# Altium PCB EC14_AdaptorBoard.PcbDoc
Units mm, origin at the board's own origin, x right, y up, seen from the top; angles counter-clockwise.
Board outline 91.4 x 34.2 mm, 2 copper layers (Top Layer, Bottom Layer); 40 components, 34 nets, 113 pads, 204 vias.
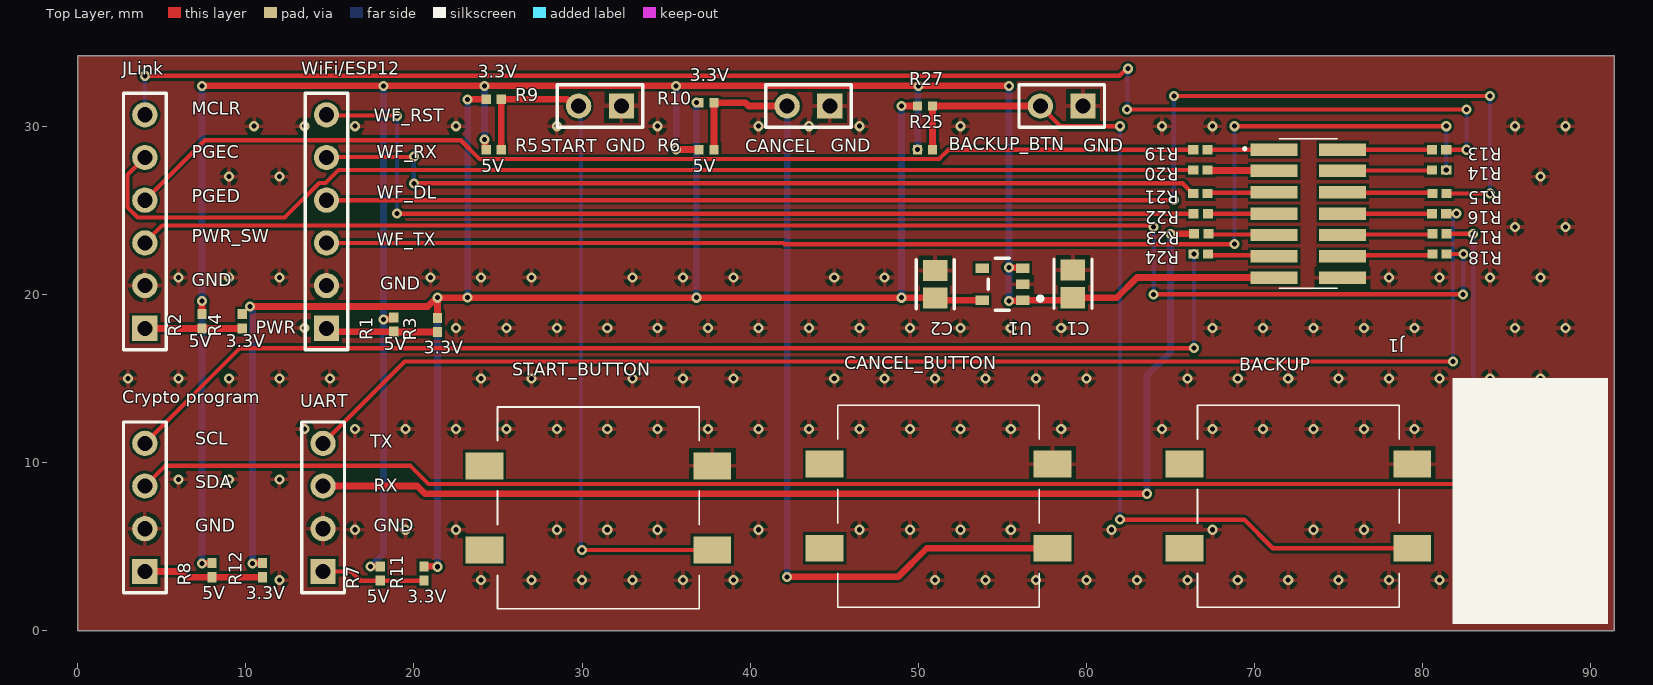
[diagram p0: Top Layer view]
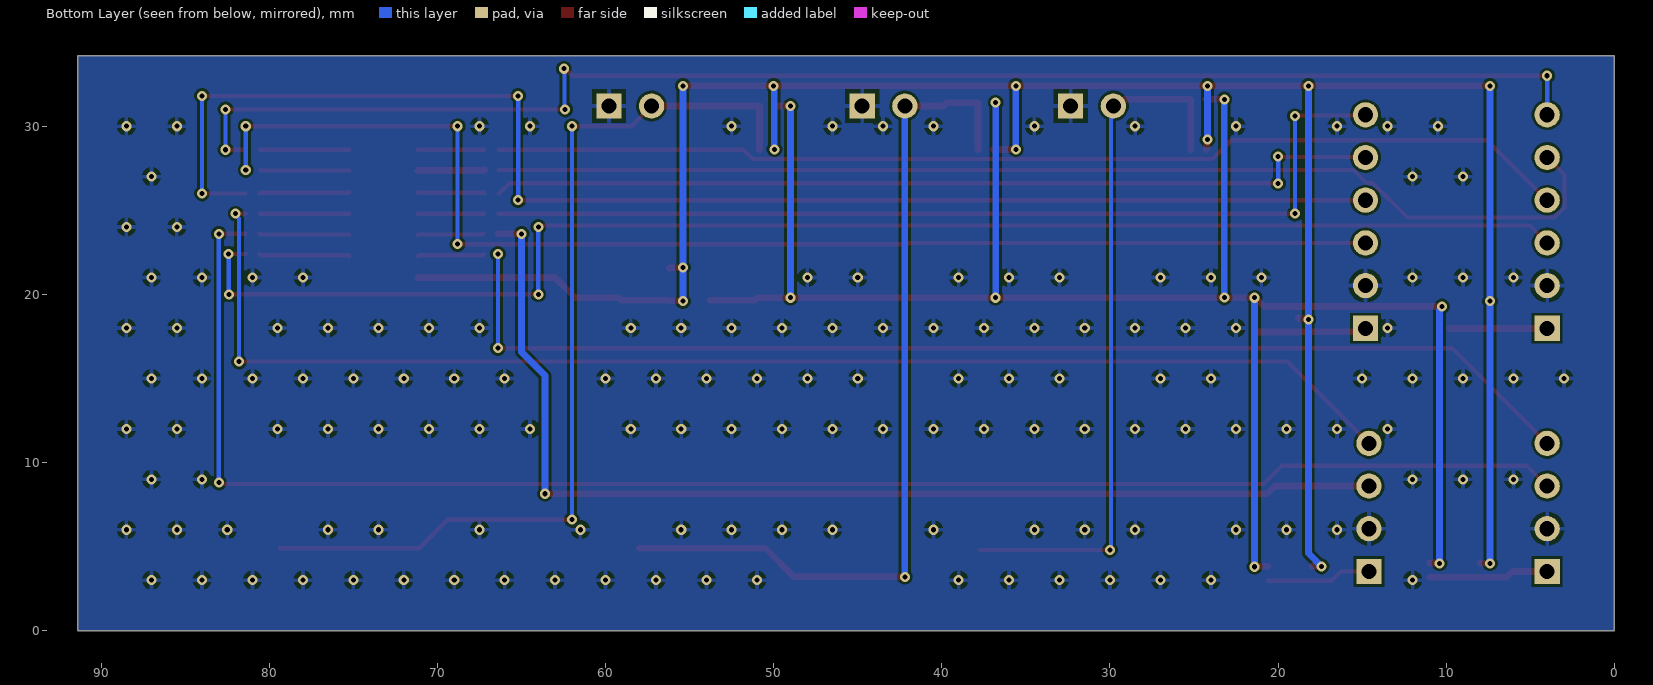
[diagram p1: Bottom Layer view, seen from below]

## Layer stack, top to bottom
Top Solder: solder mask 0.0102, Solder Resist, Dk 3.5
Top Layer: signal copper 0.0356
Dielectric 1: dielectric 0.32, FR-4, Dk 4.8
Bottom Layer: signal copper 0.0356
Bottom Solder: solder mask 0.0102, Solder Resist, Dk 3.5

## Board outline
0,0 91.4,0 91.4,34.2 0,34.2

## Design rules (kind name [scope] priority, off if disabled: settings)
Clearance [All] p1: gap=0.152 ignorepadtopadclearanceinfootprint=FALSE
PolygonConnect [All] p1: connectstyle=Relief reliefconductorwidth=0.254 reliefentries=4 polygonreliefangle="90 Angle" airgapwidth=0.254
RoomDefinition EC14_AdaptorBoard [InComponentClass('EC14_AdaptorBoard')] p1: confinementstyle=ConfineIn formatcopy=TRUE lockcomponents=FALSE outline 0,0 91.4,0 91.4,34.2 0,34.2
RoutingVias [All] p1: holewidth=0.3 width=0.6 viastyle="Through Hole" minholewidth=0.3 minwidth=0.6 maxholewidth=6 maxwidth=6.3
SolderMaskExpansion [All] p1: expansion=0.102 istentingtop=FALSE
Width [All] p1: maxlimit=1 minlimit=0.2 preferedwidth=0.4
30 further rules are at their usual default settings.

## Components (designator, comment, footprint, x,y, rotation, side; value= is the part's Value field where it differs from the comment)
BACKUP "1.14.001.503_0000" 1140015030000_BTN 72.6,7.4 r180 top
BACKUP_BTN "Header 2" HDR1X2 59.8,31.2 r180 top
C1 "10u 10V" FP-CL21-IPC_B 59.2,20.626 r90 top
C2 "10u 10V" FP-CL21-IPC_B 51,20.6 r90 top
CANCEL "Header 2" HDR1X2 44.74,31.2 r180 top
CANCEL_BUTTON "1.14.001.503_0000" 1140015030000_BTN 51.2,7.4 r180 top
"Crypto program" "Header 4" HDR1X4 4,3.52 r90 top
J1 "FTSH-107-01-F-DV" FTSH-107-XX-YYY-DV 73.2,24.8 r270 top
JLink "Header 6" HDR1X6 4,17.98 r90 top
R1 "0R 5% 0402 / DNI" RESC1005X40X25NL05T10 18.8,18.2 r90 top
R2 "0R 5% 0402 / DNI" RESC1005X40X25NL05T10 7.4,18.4 r90 top
R3 "0R 5% 0402" RESC1005X40X25NL05T10 21.4,18.175 r90 top
R4 "0R 5% 0402" RESC1005X40X25NL05T10 9.8,18.4 r90 top
R5 "10K 1% / DNI" RESC1005X40X25NL05T05 24.75,28.6 r0 top
R6 "10K 1% / DNI" RESC1005X40X25NL05T05 37.4,28.6 r0 top
R7 "0R 5% 0402 / DNI" RESC1005X40X25NL05T10 18,3.4 r90 top
R8 "0R 5% 0402 / DNI" RESC1005X40X25NL05T10 8,3.6 r90 top
R9 "10K 1%" RESC1005X40X25NL05T05 24.75,31.6 r0 top
R10 "10K 1%" RESC1005X40X25NL05T05 37.4,31.4 r0 top
R11 "0R 5% 0402" RESC1005X40X25NL05T10 20.6,3.4 r90 top
R12 "0R 5% 0402" RESC1005X40X25NL05T10 11,3.6 r90 top
R13 "0R 5% 0402" RESC1005X40X25NL05T10 80.975,28.6 r180 top
R14 "0R 5% 0402" RESC1005X40X25NL05T10 80.975,27.4 r180 top
R15 "0R 5% 0402" RESC1005X40X25NL05T10 81,26 r180 top
R16 "0R 5% 0402" RESC1005X40X25NL05T10 80.975,24.8 r180 top
R17 "0R 5% 0402" RESC1005X40X25NL05T10 81,23.6 r180 top
R18 "0R 5% 0402" RESC1005X40X25NL05T10 81,22.4 r180 top
R19 "0R 5% 0402" RESC1005X40X25NL05T10 66.775,28.6 r180 top
R20 "0R 5% 0402" RESC1005X40X25NL05T10 66.775,27.4 r180 top
R21 "0R 5% 0402" RESC1005X40X25NL05T10 66.775,26 r180 top
R22 "0R 5% 0402" RESC1005X40X25NL05T10 66.8,24.8 r180 top
R23 "0R 5% 0402" RESC1005X40X25NL05T10 66.825,23.6 r180 top
R24 "0R 5% 0402" RESC1005X40X25NL05T10 66.8,22.4 r180 top
R25 "10K 1% / DNI" RESC1005X40X25NL05T05 50.4,28.6 r0 top
R27 "10K 1%" RESC1005X40X25NL05T05 50.4,31.2 r0 top
START "Header 2" HDR1X2 32.34,31.2 r180 top
START_BUTTON "1.14.001.503_0000" 1140015030000_BTN 30.975,7.3 r180 top
U1 "AP2204K-3.3TRG1" FP-SOT25-MFG 55,20.6 r180 top
UART "Header 4" HDR1X4 14.6,3.52 r90 top
WiFi/ESP12 "Header 6" HDR1X6 14.8,17.98 r90 top

## Footprints (in the part's own frame and the unit in brackets; to place one, negate y for a bottom-side part, rotate by r counter-clockwise, add the part's x,y. Pads: shape width x height; smd on the part's side, far side on the other; paste and mask are expansions set on the pad)
1140015030000_BTN [mm]
  rect 2.25x1.6 smd: 1(-6.775,-2.5) 2(6.775,-2.5) 3(6.775,2.5) 4(-6.775,2.5)
  silkscreen extent -6,-6 6,6, body extent -7.74,-6 7.74,6, height 5.15
FP-CL21-IPC_B [mm]
  rect 1.255x1.456 smd paste+0 mask+0: 1(-0.826,0) 2(0.826,0)
  silkscreen extent -1.45,-1.13 1.45,1.13, body extent -1.7,-0.98 1.7,0.98, height 0.25
FP-SOT25-MFG [mm]
  rect 0.8x0.55 smd paste+0 mask+0: 1(-1.2,0.95) 2(-1.2,0) 3(-1.2,-0.95) 4(1.2,-0.95) 5(1.2,0.95)
  silkscreen extent -2.38,-1.55 0.85,1.55, body extent -1.7,-1.65 1.7,1.65, height 0.25
FTSH-107-XX-YYY-DV [mm]
  rect 0.74x2.79 smd: 1(-3.81,-2.035) 2(-3.81,2.035) 3(-2.54,-2.035) 4(-2.54,2.035) 5(-1.27,-2.035) 6(-1.27,2.035) 7(0,-2.035) 8(0,2.035) 9(1.27,-2.035) 10(1.27,2.035) 11(2.54,-2.035) 12(2.54,2.035) 13(3.81,-2.035) 14(3.81,2.035)
  silkscreen extent -4.44,-3.83 4.44,1.72
HDR1X2 [mm] "Connector; Header; 2 Position"
  rect 1.5x1.5 hole 0.9: 1(0,0)
  round 1.5 hole 0.9: 2(2.54,0)
  silkscreen extent -1.27,-1.27 3.81,1.27
HDR1X4 [mm] "Connector; Header; 4 Position"
  rect 1.5x1.5 hole 0.9: 1(0,0)
  round 1.5 hole 0.9: 2(2.54,0) 3(5.08,0) 4(7.62,0)
  silkscreen extent -1.27,-1.27 8.89,1.27
HDR1X6 [mm] "Connector; Header; 6 Position"
  rect 1.5x1.5 hole 0.9: 1(0,0)
  round 1.5 hole 0.9: 2(2.54,0) 3(5.08,0) 4(7.62,0) 5(10.16,0) 6(12.7,0)
  silkscreen extent -1.27,-1.27 13.97,1.27
RESC1005X40X25NL05T05 [mm] "Chip Resistor, 2-Leads, Body 1.00x0.50mm, IPC Medium Density"
  rect 0.55x0.55 smd: 1(-0.45,0) 2(0.45,0)
  body extent -0.53,-0.27 0.53,0.28, height 0.4
RESC1005X40X25NL05T10 [mm] "Chip Resistor, 2-Leads, Body 1.00x0.50mm, IPC Medium Density"
  rect 0.6x0.55 smd: 1(-0.425,0) 2(0.425,0)
  body extent -0.53,-0.27 0.53,0.28, height 0.4

## Part data
BACKUP CANCEL_BUTTON START_BUTTON: "Switch", Manufacturer_Name=RAFI, Manufacturer_Part_Number=1.14.001.503/0000, Mouser Part Number=611-1.14001.5030000, Datasheet Link=https://media.digikey.com/pdf/Data%20Sheets/RAFI%20PDF's/Racon_PCB_Tactile_Switches_Cat.pdf, Height=5.05mm, Mouser Price/Stock=https://www.mouser.co.uk/ProductDetail/RAFI/114001503-0000?qs=Mv7BduZupUj7blEiC6wMcw%3D%3D
BACKUP_BTN CANCEL START: "Header, 2-Pin", LatestRevisionDate=17-Jul-2002, LatestRevisionNote="Re-released for DXP Platform.", Publisher="Altium Limited"
C1 C2: library part CMP-2000-06103-2, "CL21A106KPFNNNE,    CL21 Series 0805 10uF 10V ±10% Tolerance X5R Multilayer Ceramic Chip Capacitor", Capacitance=10uF, Case Code (Imperial)=0805, Case Code (Metric)=2012, Dielectric=X5R, Max Operating Temperature=85°C, Min Operating Temperature=-55°C, Package Quantity=1, Tolerance=10%, Voltage Rating=10V, Case/Package=0805, Contact Plating=Tin, Depth=1.25mm, Height=1.25mm, Lead Free="Lead Free", Length=2mm, Mount="Surface Mount", Packaging="Tape and Reel", Radiation Hardening=No, Thickness=0.053inch, Voltage Rating (DC)=10V, Width=0.049inch
"Crypto program" UART: "Header, 4-Pin", LatestRevisionDate=17-Jul-2002, LatestRevisionNote="Re-released for DXP Platform.", Publisher="Altium Limited"
J1: "Connector", Manufacturer_Name=SAMTEC, Mouser2 Part Number=200-FTSH10701FDV, Datasheet Link=https://componentsearchengine.com//FTSH-107-01-F-DV.pdf, Manufacturer_Part_Number=FTSH-107-01-F-DV, Mouser2 Price/Stock=https://www.mouser.com/Search/Refine.aspx?Keyword=200-FTSH10701FDV
JLink WiFi/ESP12: "Header, 6-Pin", LatestRevisionDate=17-Jul-2002, LatestRevisionNote="Re-released for DXP Platform.", Publisher="Altium Limited"
R1 R2 R3 R4 R7 R8 R11 R12 R13 R14 R15 R16 R17 R18 R19 R20 R21 R22 R23 R24: library part CMP-2002-07912-1, "RC0402JR-070RL", Manufacturer="Yageo / Phycomp", Part Number=RC0402JR-070RL
R5 R6 R9 R10 R25 R27: library part CMP-2002-08135-1, "CRCW040210K0FKED", Manufacturer="Vishay Dale", Part Number=CRCW040210K0FKED
U1: library part CMP-2000-05782-2, "IC REG LINEAR 3.3V 150MA SOT23-5", Case/Package=SOT-23-5, Dropout Voltage=360mV, Max Input Voltage=24V, Max Operating Temperature=85°C, Max Output Current=250mA, Min Input Voltage=2.3V, Min Operating Temperature=-40°C, Output Current=150mA, Output Voltage=3.3V, Package Quantity=3000, Quiescent Current=50uA, Reference Voltage=1.24V, Height=1.3mm, Lead Free="Lead Free", Length=3.02mm, Mount="Surface Mount", Number Of Outputs=1, Number of Pins=5, Number of Regulators=1, Output Type=Fixed, Packaging="Tape and Reel", Polarity=Positive, Weight=0.001058oz, Width=1.7mm

## Via types
v1: diameter 0.6, hole 0.3, Top Layer to Bottom Layer, tented both sides, 204 vias

## Nets (pads, with @x,y where several pads share a name; then routed paths per layer and width w, separated by ;. In a path a pad name is that pad's centre, name@x,y a point inside that pad or via, vN(x,y) a via of type N, cw(c..) or ccw(c..) an arc to the next point about the centre after c; other vN are vias at no path point)
3V3_DUT: C2.1 R3.2 R4.2 R9.1 R10.1 R11.2 R12.2 R27.1 U1.5 | length 114.6
  Top Layer w0.4: v1(10.252,19.277) 20.823,19.277 21.346,19.8 v1(21.4,19.8) ; v1(10.4,4) 10.425,4.025 R12.2 ; R11.2 21.375,3.825 v1(21.4,3.8) ; R3.2 v1(21.4,19.8) ; v1(23.2,31.6) R9.1 ; v1(49,31.2) R27.1 ; U1.5 51.124,19.65 C2.1 50.974,19.8 v1(49,19.8) v1(36.8,19.8) v1(21.4,19.8)
  Bottom Layer w0.4: v1(10.252,19.277) 10.252,19.223 10.4,19.076 v1(10.4,4) ; v1(21.4,3.8) v1(21.4,19.8) ; v1(23.193,19.817) 23.2,19.824 v1(23.2,31.6) ; v1(36.8,19.8) v1(36.8,31.4) ; v1(49,19.8) v1(49,31.2)
5V_DUT: C1.1 J1.13 R1.2 R2.2 R5.1 R6.1 R7.2 R8.2 R25.1 U1.1 U1.3 | length 150.7
  Top Layer w0.4: v1(7.4,4) 7.975,4 R8.2 ; R2.2 v1(7.4,19.6) ; v1(7.4,32.4) v1(18.2,32.4) v1(24.2,32.4) v1(35.6,32.4) v1(50,32.4) v1(55.4,32.4) ; v1(17.419,3.819) 17.422,3.822 17.997,3.822 R7.2 ; v1(18.2,18.5) 18.238,18.538 18.725,18.538 18.8,18.613 R1.2 ; v1(24.2,29.2) 24.225,29.175 24.225,28.675 R5.1 ; v1(35.6,28.625) 35.612,28.613 36.938,28.613 R6.1 ; v1(55.4,19.6) 55.425,19.625 56.175,19.625 U1.1 59.05,19.65 C1.1 61.8,19.8 63,21 71.155,21 J1.13 ; v1(55.4,21.6) 55.425,21.575 56.175,21.575 U1.3
  Bottom Layer w0.4: v1(7.4,4) v1(7.4,19.6) v1(7.4,32.4) ; v1(17.419,3.819) 18.2,4.6 v1(18.2,18.5) v1(18.2,32.4) ; v1(24.2,29.2) v1(24.2,32.4) ; v1(35.6,28.625) v1(35.6,32.4) ; v1(49.95,28.625) 49.975,28.65 49.975,32.375 v1(50,32.4) ; v1(55.4,19.6) v1(55.4,21.6) v1(55.4,32.4)
ATS_I2C_SCL: "Crypto program.4" R24.2 | length 70.4
  Top Layer w0.254: 4,11.14 9.66,16.8 v1(66.4,16.8) ; R24.2@66.35,22.4 R24.2
  Bottom Layer w0.254: v1(66.4,16.8) v1(66.4,22.4)
ATS_I2C_SDA: "Crypto program.3" R17.1 | length 96.4
  Top Layer w0.254: 4,8.6 5.2,9.8 19.8,9.8 20.879,8.721 82.827,8.721 82.906,8.8 v1(83,8.8) ; R17.1 v1(83,23.6)
  Bottom Layer w0.254: v1(83,8.8) v1(83,23.6)
GND: "Crypto program.2" BACKUP.1 BACKUP_BTN.1 C1.2 C2.2 CANCEL.1 CANCEL_BUTTON.1 J1.14 JLink.2 START.1 START_BUTTON.1 U1.2 UART.2 WiFi/ESP12.2
  other v1: 12,3 24,3 27,3 30,3 33,3 36,3 39,3 51,3 54,3 57,3 60,3 63,3 66,3 69,3 72,3 75,3 78,3 81,3 84,3 87,3 16.5,6 19.5,6 22.5,6 28.5,6 31.5,6 34.5,6 40.5,6 46.5,6 49.5,6 52.5,6 55.5,6 61.5,6 67.5,6 73.5,6 76.5,6 82.5,6 85.5,6 88.5,6 6,9 9,9 12,9 84,9 87,9 13.5,12 16.5,12 19.5,12 22.5,12 25.5,12 28.5,12 31.5,12 34.5,12 37.5,12 40.5,12 43.5,12 46.5,12 49.5,12 52.5,12 55.5,12 58.5,12 64.5,12 67.5,12 70.5,12 73.5,12 76.5,12 79.5,12 85.5,12 88.5,12 3,15 6,15 9,15 12,15 15,15 24,15 27,15 33,15 36,15 39,15 45,15 48,15 51,15 54,15 57,15 60,15 66,15 69,15 72,15 75,15 78,15 81,15 84,15 87,15 13.5,18 22.5,18 25.5,18 28.5,18 31.5,18 34.5,18 37.5,18 40.5,18 43.5,18 46.5,18 49.5,18 52.5,18 55.5,18 58.5,18 67.5,18 70.5,18 73.5,18 76.5,18 79.5,18 85.5,18 88.5,18 6,21 9,21 12,21 21,21 24,21 27,21 33,21 36,21 39,21 45,21 48,21 78,21 81,21 84,21 87,21 85.5,24 88.5,24 9,27 12,27 87,27 10.5,30 13.5,30 16.5,30 22.5,30 28.5,30 34.5,30 40.5,30 43.5,30 46.5,30 52.5,30 64.5,30 67.5,30 85.5,30 88.5,30
MCLR/NRST: JLink.6 R13.1 | length 87.2
  Top Layer w0.254: v1(4,33) 61.966,33 62.385,33.419 v1(62.479,33.419) ; v1(62.4,31) v1(82.6,31) ; R13.1 v1(82.6,28.6)
  Bottom Layer w0.254: JLink.6 v1(4,33) ; v1(62.4,31) 62.44,31.04 62.44,33.38 v1(62.479,33.419) ; v1(82.6,28.6) v1(82.6,31)
NetBACKUP_4: BACKUP.4 BACKUP_BTN.2 R25.2 R27.2 | length 55.7
  Top Layer w0.254: BACKUP_BTN.2 58.46,30 v1(62,30) ; v1(62,6.6) 69.385,6.6 71.085,4.9 BACKUP.4
  Top Layer w0.4: R25.2 R27.2 BACKUP_BTN.2
  Bottom Layer w0.254: v1(62,6.6) v1(62,30)
NetCANCEL_2: CANCEL.2 CANCEL_BUTTON.4 R6.2 R10.2 | length 51.7
  Top Layer w0.4: R6.2 R10.2 39.708,31.4 39.908,31.2 CANCEL.2 ; v1(42.2,3.2) 48.802,3.2 50.502,4.9 CANCEL_BUTTON.4
  Bottom Layer w0.4: v1(42.2,3.2) CANCEL.2
"NetCrypto program_1": "Crypto program.1" R8.1 R12.1 | length 7.1
  Top Layer w0.4: 4,3.52 6.065,3.52 6.41,3.175 R12.1
NetJ1_1: J1.1 R19.1 | length 4
  Top Layer w0.254: R19.1 67.205,28.605 71.16,28.605 J1.1
NetJ1_2: J1.2 R13.2 | length 5.3
  Top Layer w0.254: J1.2 75.24,28.605 80.545,28.605 R13.2
NetJ1_3: J1.3 R20.1 | length 4
  Top Layer w0.4: R20.1 67.23,27.37 71.135,27.37 J1.3
NetJ1_4: J1.4 R14.2 | length 5.3
  Top Layer w0.254: J1.4 75.265,27.37 80.52,27.37 R14.2
NetJ1_5: J1.5 R21.1 | length 4
  Top Layer w0.254: R21.1 67.235,26.035 71.13,26.035 J1.5
NetJ1_6: J1.6 R15.2 | length 5.4
  Top Layer w0.254: J1.6 75.27,26.035 80.54,26.035 R15.2
NetJ1_7: J1.7 R22.1 | length 3.9
  Top Layer w0.254: R22.1 J1.7
NetJ1_8: J1.8 R16.2 | length 5.3
  Top Layer w0.254: J1.8 R16.2
NetJ1_9: J1.9 R23.1 | length 3.9
  Top Layer w0.254: R23.1 67.285,23.565 71.13,23.565 J1.9
NetJ1_10: J1.10 R17.2 | length 5.4
  Top Layer w0.254: J1.10 75.27,23.565 80.54,23.565 R17.2
NetJ1_11: J1.11 R24.1 | length 4
  Top Layer w0.254: R24.1 67.295,22.33 71.095,22.33 J1.11
NetJ1_12: J1.12 R18.2 | length 5.4
  Top Layer w0.254: J1.12 75.305,22.33 80.505,22.33 R18.2
NetJLink_1: JLink.1 R2.1 R4.1 | length 5.8
  Top Layer w0.4: JLink.1 4.005,17.975 R4.1
NetR1_1: R1.1 R3.1 WiFi/ESP12.1 | length 6.7
  Top Layer w0.4: WiFi/ESP12.1 15.005,17.775 18.775,17.775 18.8,17.75 18.812,17.762 21.388,17.762 R3.1
NetR5_2: R5.2 R9.2 START.2 START_BUTTON.4 | length 42
  Top Layer w0.254: v1(30,4.8) START_BUTTON.4
  Top Layer w0.4: R5.2 R9.2 29.102,31.6 29.502,31.2 START.2
  Bottom Layer w0.254: START.2 29.934,31.066 29.934,4.866 v1(30,4.8)
NetR7_1: R7.1 R11.1 UART.1 | length 6.2
  Top Layer w0.254: UART.1 16.265,3.52 16.81,2.975 R11.1
PGEC/SWCLK: JLink.5 R20.2 | length 68.2
  Top Layer w0.254: JLink.5 2.971,27.111 2.971,25.174 3.574,24.571 12.315,24.571 14.374,26.629 14.745,26.629 15.516,27.4 R20.2
PGED/SWDIO: JLink.4 R19.2 | length 64.5
  Top Layer w0.254: JLink.4 7.569,29.169 22.785,29.169 23.909,28.046 51.241,28.046 51.795,28.6 R19.2
POWER_SW: JLink.3 R18.1 | length 86.3
  Top Layer w0.254: JLink.3 5.029,24.089 63.817,24.089 63.906,24 v1(64,24) ; v1(64,20) v1(82.4,20) ; R18.1 81.431,22.406 82.415,22.406 v1(82.421,22.411)
  Bottom Layer w0.254: v1(64,20) v1(64,24) ; v1(82.4,20) 82.41,20.01 82.41,22.401 v1(82.421,22.411)
U6_RX: R23.2 UART.3 | length 66.6
  Top Layer w0.4: UART.3 20.2,8.6 20.659,8.141 v1(63.6,8.141) ; v1(65,23.6) R23.2
  Bottom Layer w0.4: v1(63.6,8.141) 63.6,15.171 65,16.571 v1(65,23.6)
U6_TX: R16.1 UART.4 | length 78.7
  Top Layer w0.254: UART.4 19.46,16 v1(81.8,16) ; R16.1 v1(82,24.8)
  Bottom Layer w0.254: v1(81.8,16) 81.8,24.506 82,24.706 v1(82,24.8)
WF_DL: R15.1 WiFi/ESP12.4 | length 83.8
  Top Layer w0.254: WiFi/ESP12.4 v1(65.2,25.6) ; v1(65.2,31.8) v1(84,31.8) ; R15.1 v1(84,26)
  Bottom Layer w0.254: v1(65.2,25.6) v1(65.2,31.8) ; v1(84,26) v1(84,31.8)
WF_RST: R22.2 WiFi/ESP12.6 | length 57.4
  Top Layer w0.254: WiFi/ESP12.6 14.84,30.64 18.96,30.64 v1(19,30.6) ; v1(19,24.8) R22.2
  Bottom Layer w0.254: v1(19,24.8) v1(19,30.6)
WF_RX: R21.2 WiFi/ESP12.5 | length 53.4
  Top Layer w0.254: WiFi/ESP12.5 14.83,28.17 19.97,28.17 v1(20,28.2) ; v1(20,26.6) 65.725,26.6 66.325,26 R21.2
  Bottom Layer w0.254: v1(20,26.6) v1(20,28.2)
WF_TX: R14.1 WiFi/ESP12.3 | length 76.2
  Top Layer w0.254: WiFi/ESP12.3 41.971,23.06 42.045,22.986 v1(68.8,22.986) ; v1(68.8,30) v1(81.4,30)
  Bottom Layer w0.254: v1(68.8,22.986) v1(68.8,30) ; v1(81.4,27.4) v1(81.4,30)
pads on no net: BACKUP.2 BACKUP.3 CANCEL_BUTTON.2 CANCEL_BUTTON.3 START_BUTTON.2 START_BUTTON.3 U1.4

## Polygon pours and split planes (outlines as drawn)
no net on Top Overlay "NONET_L01_P-001" (solid): 81.8,15 81.8,0.4 91,0.4 91,15
GND on Top Layer "GND_L01_P001" (solid, pour order 1): 0,34.2 0,0 91.4,0 91.4,34.2
GND on Bottom Layer "GND_L02_P000" (solid, pour order 0): 0,0 0,34.2 91.4,34.2 91.4,0

## Silkscreen, mask and mechanical layers (free items; w line width, h text height)
Top Overlay:
  text "3.3V" at 23.8,32.6 h1.3
  text "3.3V" at 36.4,32.4 h1.3
  text "MCLR" at 6.8,30.414 h1.3
  text "WF_RST" at 17.6,30 h1.3
  text "GND" at 31.4,28.214 h1.3
  text "GND" at 44.8,28.214 h1.3
  text "GND" at 59.8,28.214 h1.3
  text "WF_RX" at 17.8,27.831 h1.3
  text "PGEC" at 6.8,27.814 h1.3
  text "5V" at 24,27 h1.3
  text "5V" at 36.6,27 h1.3
  text "WF_DL" at 17.8,25.431 h1.3
  text "PGED" at 6.8,25.214 h1.3
  text "PWR_SW" at 6.8,22.831 h1.3
  text "WF_TX" at 17.8,22.631 h1.3
  text "GND" at 6.8,20.214 h1.3
  text "GND" at 18,20.014 h1.3
  text "PWR" at 10.6,17.4 h1.3
  text "5V" at 6.6,16.6 h1.3
  text "3.3V" at 8.8,16.6 h1.3
  text "5V" at 18.2,16.4 h1.3
  text "3.3V" at 20.6,16.2 h1.3
  text "SCL" at 7,10.8 h1.3
  text "TX" at 17.4,10.6 h1.3
  text "SDA" at 7,8.2 h1.3
  text "RX" at 17.6,8 h1.3
  text "GND" at 7,5.6 h1.3
  text "GND" at 17.6,5.6 h1.3
  text "5V" at 7.4,1.6 h1.3
  text "3.3V" at 10,1.6 h1.3
  text "5V" at 17.2,1.4 h1.3
  text "3.3V" at 19.6,1.4 h1.3